# EAGLE board LDR array (EAGLE 8.6.3)
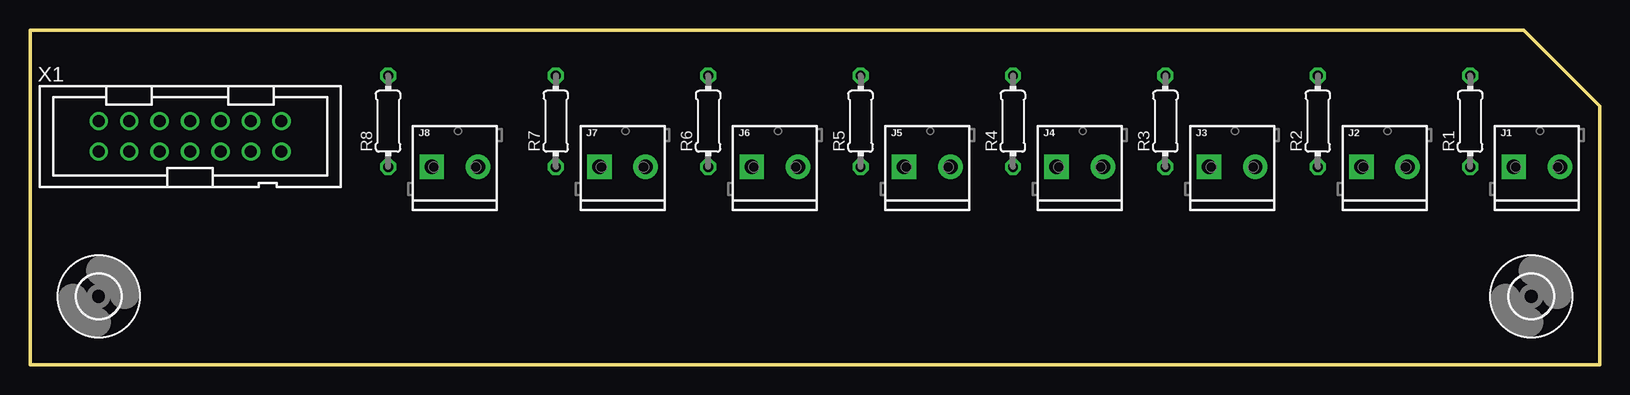
[diagram p0: board, top side]
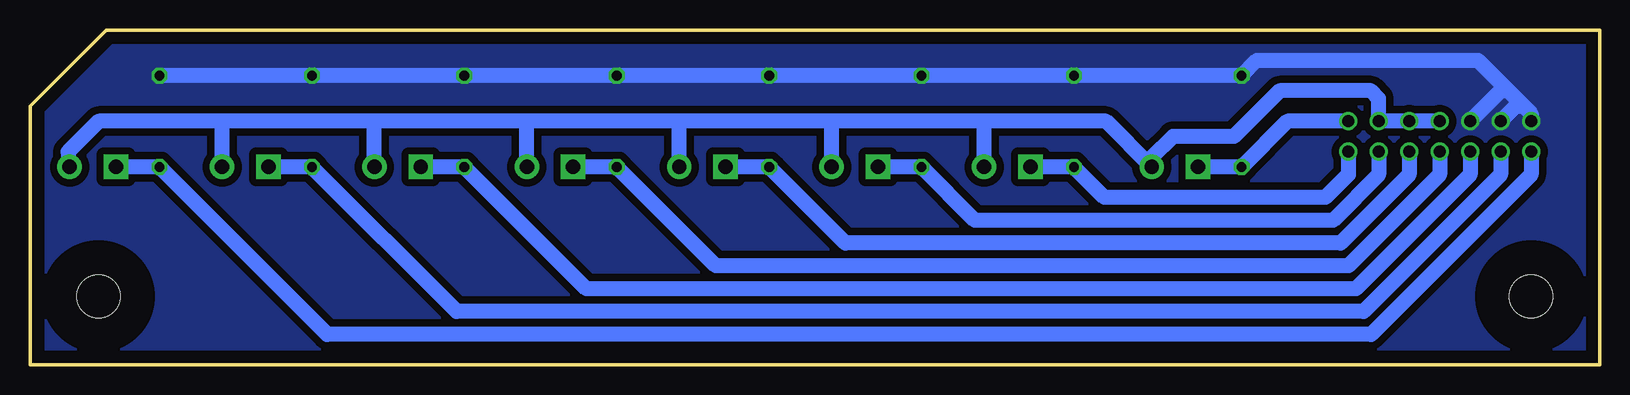
[diagram p1: board, bottom side, seen from below]

Size 130.81 x 27.94 mm. Coordinates in mm from the lower left corner, seen from the top.
Outline: 0,0 130.79,0
Outline: 0,0 0,27.94 124.46,27.94 130.81,21.59 130.81,0 0,0
Copper layers (1*16): Top 0.035mm / dielectric 1.5mm / Bottom 0.035mm
Design rules "default": minimum track width 6mil, minimum drill 0.35mm, track to track 6mil, track to pad 6mil, pad to pad 6mil, via to via 6mil, smd to smd 6mil, copper to edge 40mil, drill to drill 6mil, minimum pad ring 10mil, minimum via ring 8mil, stop-mask expansion 4mil, vias tented up to drill 0mil, thermal gap 10mil

## Footprints (pad centres in the part's own frame; a part is rotated, then mirrored left to right if it is on the bottom)
3,6 = hole 3.6: 0,0
SCREWTERMINAL-3.5MM-2_LOCK = drill 1.2 pad 2.032 square: 1 -0.178,0 | drill 1.2 pad 2.032: 2 3.678,0
0204/7 = drill 0.813 octagon: 1 -3.81,0; 2 3.81,0
PAK100/2500-14 = drill 1 pad 1.422: 1 -7.62,-1.27; 2 -7.62,1.27; 3 -5.08,-1.27; 4 -5.08,1.27; 5 -2.54,-1.27; 6 -2.54,1.27; 7 0,-1.27; 8 0,1.27; 9 2.54,-1.27; 10 2.54,1.27; 11 5.08,-1.27; 12 5.08,1.27; 13 7.62,-1.27; 14 7.62,1.27

## Placement (x,y rotation side)
H1  MOUNT-HOLE3.6  [3,6]  5.71,5.71 0 top
H2  MOUNT-HOLE3.6  [3,6]  125.09,5.71 0 top
J1  [SCREWTERMINAL-3.5MM-2_LOCK]  123.83,16.51 0 top
J2  [SCREWTERMINAL-3.5MM-2_LOCK]  111.12,16.51 0 top
J3  [SCREWTERMINAL-3.5MM-2_LOCK]  98.42,16.51 0 top
J4  [SCREWTERMINAL-3.5MM-2_LOCK]  85.72,16.51 0 top
J5  [SCREWTERMINAL-3.5MM-2_LOCK]  73.03,16.51 0 top
J6  [SCREWTERMINAL-3.5MM-2_LOCK]  60.33,16.51 0 top
J7  [SCREWTERMINAL-3.5MM-2_LOCK]  47.62,16.51 0 top
J8  [SCREWTERMINAL-3.5MM-2_LOCK]  33.66,16.51 0 top
R1  [0204/7]  120.02,20.32 90 top
R2  [0204/7]  107.31,20.32 90 top
R3  [0204/7]  94.61,20.32 90 top
R4  [0204/7]  81.92,20.32 90 top
R5  [0204/7]  69.22,20.32 90 top
R6  [0204/7]  56.52,20.32 90 top
R7  [0204/7]  43.81,20.32 90 top
R8  [0204/7]  29.84,20.32 90 top
X1  2514-  [PAK100/2500-14]  13.34,19.05 0 top

## Library data of the parts
H1 H2 = holes
J1-J8 = SparkFun-Connectors; PROD_ID: CONN-08399
R1-R8 = rcl; SPICEPREFIX: R
X1 = con-3m; OC_FARNELL: unknown; OC_NEWARK: unknown

## Nets
GND: R1.2 R2.2 R3.2 R4.2 R5.2 R6.2 R7.2 R8.2 X1.2 X1.4 X1.6
LDRVCC: J1.2 J2.2 J3.2 J4.2 J5.2 J6.2 J7.2 J8.2 X1.8 X1.10 X1.12
N$1: J1.1 R1.1 X1.1
N$2: J2.1 R2.1 X1.3
N$3: J3.1 R3.1 X1.5
N$4: J4.1 R4.1 X1.7
N$5: J5.1 R5.1 X1.9
N$6: J6.1 R6.1 X1.11
N$7: J7.1 R7.1 X1.13
N$8: J8.1 R8.1 X1.14

## Tracks (layer width: path | path; a pad name or v marks a point on that pad's centre or on a via)
GND
  Bottom 1.27: R1.2 R2.2 R3.2 R4.2 R5.2 R6.2 R7.2 R8.2 28.57,25.4 10.16,25.4 7.62,22.86 | X1.2 5.71,20.95 6.35,21.59 | 7.62,22.86 6.35,21.59 | X1.4 6.99,21.59 6.35,21.59 | X1.6 8.26,22.86 7.62,22.86
  pour Bottom (isolate 0.61, no thermals): 0,0 0,24.13 0,27.94 124.46,27.94 130.81,21.59 130.81,0
LDRVCC
  Bottom 1.27: 51.44,20.32 41.14,20.32 J8.2 37.33,17.28 35.56,19.05 30.48,19.05 26.67,22.86 19.05,22.86 18.41,22.23 X1.12 X1.10 X1.8 | 51.44,20.32 64.14,20.32 | 64.14,20.32 76.83,20.32 | 76.83,20.32 89.53,20.32 | 89.53,20.32 102.23,20.32 | 102.23,20.32 114.94,20.32 | 114.94,20.32 125.09,20.32 127.64,17.78 127.64,16.64 J1.2 | J2.2 114.8,20.19 114.94,20.32 | J3.2 102.1,20.19 102.23,20.32 | J4.2 89.4,20.19 89.53,20.32 | J5.2 76.7,20.19 76.83,20.32 | J6.2 64,20.19 64.14,20.32 | J7.2 51.3,20.19 51.44,20.32
N$1
  Bottom 1.27: J1.1 R1.1 106.05,2.54 19.05,2.54 5.71,15.88 X1.1
N$2
  Bottom 1.27: J2.1 R2.1 95.25,4.45 19.68,4.45 8.26,15.88 X1.3
N$3
  Bottom 1.27: J3.1 R3.1 84.45,6.35 20.32,6.35 10.79,15.88 X1.5
N$4
  Bottom 1.27: J4.1 R4.1 73.66,8.26 20.95,8.26 13.34,15.88 X1.7
N$5
  Bottom 1.27: J5.1 R5.1 62.87,10.16 21.59,10.16 15.88,15.88 X1.9
N$6
  Bottom 1.27: J6.1 R6.1 52.07,12.06 22.23,12.06 18.41,15.88 X1.11
N$7
  Bottom 1.27: J7.1 R7.1 41.27,13.97 22.86,13.97 20.95,15.88 X1.13
N$8
  Bottom 1.27: J8.1 R8.1 26.04,20.32 X1.14